# EAGLE board Stunning Rottis (EAGLE 9.7.0)

Size 191.51 x 109.12 mm. Coordinates in mm from the lower left corner, seen from the top.
Outline: 0,0 191.51,0 191.51,109.12 0,109.12 0,0
Copper layers (1*16): Top 0.035mm / dielectric 1.5mm / Bottom 0.035mm
Design rules "default": minimum track width 6mil, minimum drill 0.35mm, track to track 6mil, track to pad 6mil, pad to pad 6mil, via to via 6mil, smd to smd 6mil, copper to edge 40mil, drill to drill 6mil, minimum pad ring 10mil, minimum via ring 8mil, stop-mask expansion 4mil, vias tented up to drill 0mil, thermal gap 10mil

## Footprints (pad centres in the part's own frame; a part is rotated, then mirrored left to right if it is on the bottom)
RESAD1016W63L850D250B = drill 0.83 pad 1.43: 1 -5.08,0; 2 5.08,0
DIP762W53P254L1969H508Q16B = drill 0.743 pad 1.343: 1 -3.81,8.89; 2 -3.81,6.35; 3 -3.81,3.81; 4 -3.81,1.27; 5 -3.81,-1.27; 6 -3.81,-3.81; 7 -3.81,-6.35; 8 -3.81,-8.89; 9 3.81,-8.89; 10 3.81,-6.35; 11 3.81,-3.81; 12 3.81,-1.27; 13 3.81,1.27; 14 3.81,3.81; 15 3.81,6.35; 16 3.81,8.89
ARDUINO-UNO-R3-SHIELD = drill 1.016 pad 1.88: 3.3V 24.13,-2.54; 5V 24.13,0; A0 24.13,12.7; A1 24.13,15.24; A2 24.13,17.78; A3 24.13,20.32; A4 24.13,22.86; A5 24.13,25.4; AREF -24.13,-13.97; D2 -24.13,20.32; D3 -24.13,17.78; D4 -24.13,15.24; D5 -24.13,12.7; D6 -24.13,10.16; D7 -24.13,7.62; D8 -24.13,3.81; D9 -24.13,1.27; D10 -24.13,-1.27; D11 -24.13,-3.81; D12 -24.13,-6.35; D13 -24.13,-8.89; GND@0 24.13,2.54; GND@1 24.13,5.08; GND@2 -24.13,-11.43; IOREF 24.13,-7.62; NC 24.13,-10.16; RES 24.13,-5.08; RX -24.13,25.4; SCL -24.13,-19.05; SDA -24.13,-16.51; TX -24.13,22.86; VIN 24.13,7.62

## Placement (x,y rotation side)
R1  560  [RESAD1016W63L850D250B]  149.14,23.6 90 top
R2  560  [RESAD1016W63L850D250B]  154.76,23.13 90 top
R3  560  [RESAD1016W63L850D250B]  159.87,23.93 90 top
R4  560  [RESAD1016W63L850D250B]  164.98,23.44 90 top
R5  560  [RESAD1016W63L850D250B]  170.34,23.2 90 top
R6  560  [RESAD1016W63L850D250B]  175.69,23.2 90 top
R7  560  [RESAD1016W63L850D250B]  180.31,23.44 90 top
R8  560  [RESAD1016W63L850D250B]  185.18,23.93 90 top
U1  74HC595_PDIP  [DIP762W53P254L1969H508Q16B]  85.25,101.47 270 top
U2  ARDUINO-UNO-R3-SHIELD  [ARDUINO-UNO-R3-SHIELD]  47.88,29.84 270 top
U3  74HC595_PDIP  [DIP762W53P254L1969H508Q16B]  52.23,101.47 270 top

## Library data of the parts
R1-R8 U1-U3 = Tinkercad

## Nets
U2_5V: U1.10 U1.16 U2.5V U3.10 U3.16
U2_D2: U1.14 U2.D2
U2_D3: U1.11 U2.D3 U3.11
U2_D4: U1.12 U2.D4 U3.12
U2_GND: U1.8 U1.13 U2.GND@0 U2.GND@1 U2.GND@2 U3.8 U3.13
U3_Q0: R1.1 U3.15
U3_Q1: R2.1 U3.1
U3_Q2: R3.1 U3.2
U3_Q3: R4.1 U3.3
U3_Q4: R5.1 U3.4
U3_Q5: R6.1 U3.5
U3_Q6: R7.1 U3.6
U3_Q7: R8.1 U3.7
U3_SER: U1.9 U3.14

## Tracks (layer width: path | path; a pad name or v marks a point on that pad's centre or on a via)
U2_5V  (4 unrouted)
U2_D2  (1 unrouted)
U2_D3  (2 unrouted)
U2_D4  (2 unrouted)
U2_GND  (6 unrouted)
U3_Q0  (1 unrouted)
U3_Q1  (1 unrouted)
U3_Q2  (1 unrouted)
U3_Q3  (1 unrouted)
U3_Q4  (1 unrouted)
U3_Q5  (1 unrouted)
U3_Q6  (1 unrouted)
U3_Q7  (1 unrouted)
U3_SER  (1 unrouted)